# EAGLE board PCB v5 (EAGLE 9.7.0)
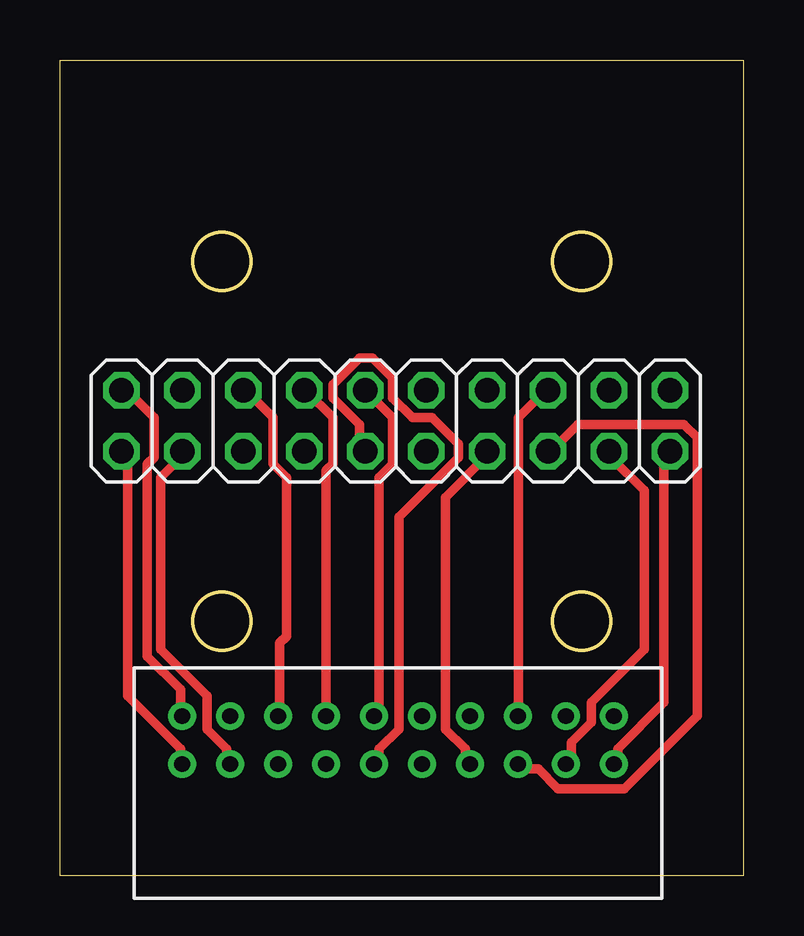
[diagram p0: board, top side]
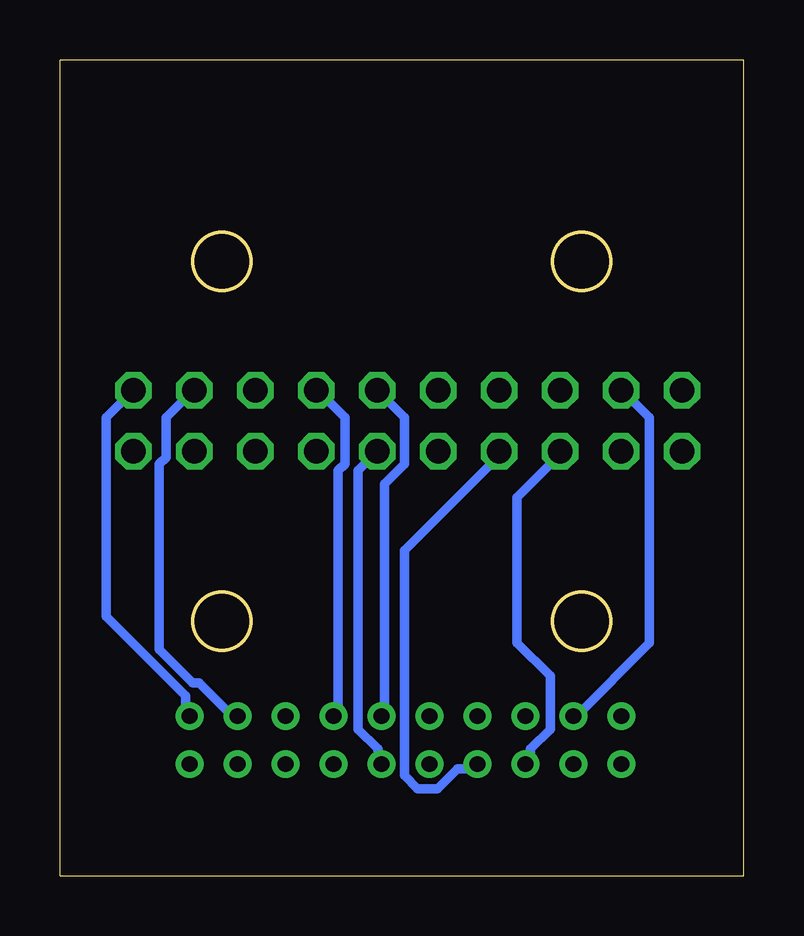
[diagram p1: board, bottom side, seen from below]

Size 28.5 x 34 mm. Coordinates in mm from the lower left corner, seen from the top.
Outline: 28.5,0 0,0 0,34 28.5,34 28.5,0
Outline: circle at 21.75,25.6 radius 1.2
Outline: circle at 21.75,10.6 radius 1.2
Outline: circle at 6.75,25.6 radius 1.2
Outline: circle at 6.75,10.6 radius 1.2
Copper layers (1*16): Top 0.035mm / dielectric 1.5mm / Bottom 0.035mm
Design rules "Fusion Electronics Design Rules": minimum track width 0.4mm, minimum drill 0.35mm, track to track 6mil, track to pad 6mil, pad to pad 6mil, via to via 6mil, smd to smd 6mil, copper to edge 40mil, drill to drill 6mil, minimum pad ring 10mil, minimum via ring 8mil, stop-mask expansion 4mil, vias tented up to drill 0mil, thermal gap 10mil

## Footprints (pad centres in the part's own frame; a part is rotated, then mirrored left to right if it is on the bottom)
2X10 = drill 1.016 octagon: 1 -11.43,-1.27; 2 -11.43,1.27; 3 -8.89,-1.27; 4 -8.89,1.27; 5 -6.35,-1.27; 6 -6.35,1.27; 7 -3.81,-1.27; 8 -3.81,1.27; 9 -1.27,-1.27; 10 -1.27,1.27; 11 1.27,-1.27; 12 1.27,1.27; 13 3.81,-1.27; 14 3.81,1.27; 15 6.35,-1.27; 16 6.35,1.27; 17 8.89,-1.27; 18 8.89,1.27; 19 11.43,-1.27; 20 11.43,1.27
HEAD_CONNECTOR = drill 0.65: P$1 2,2; P$2 2,4; P$3 4,2; P$4 4,4; P$5 6,2; P$6 6,4; P$7 8,2; P$8 8,4; P$9 10,2; P$10 10,4; P$11 12,2; P$12 12,4; P$13 14,2; P$14 14,4; P$15 16,2; P$16 16,4; P$17 18,2; P$18 18,4; P$19 20,2; P$20 20,4

## Placement (x,y rotation side)
JP1  PINHD-2X10  [2X10]  14,18.95 180 top
U$1  HEAD_CONNECTOR  [HEAD_CONNECTOR]  25.09,8.65 180 top

## Library data of the parts
JP1 = Connector; CATEGORY: Headers; DESCRIPTION: Header-Straight-2x10 Position; PACKAGE_TYPE: THT; PITCH: 0.100" (2.54mm); SUBCATEGORY: Headers-Male Pins; TYPE: Board to Board or Cable-Unshrouded-Through Hole-Straight
U$1 = PNP

## Nets
1: JP1.1 U$1.P$1
2: JP1.2 U$1.P$2
3: JP1.3 U$1.P$3
4: JP1.4 U$1.P$4
5: JP1.5 U$1.P$5
6: JP1.6 U$1.P$6
8: JP1.8
9: JP1.9
10: JP1.10
11: JP1.11 U$1.P$11
12: JP1.12 U$1.P$12
13: JP1.13 U$1.P$13
14: JP1.14 U$1.P$14
15: JP1.15 U$1.P$15
16: JP1.16 U$1.P$16
17: JP1.17 U$1.P$17
18: JP1.18 U$1.P$18
19: JP1.19 U$1.P$19
20: JP1.20 U$1.P$20
E1: JP1.7 U$1.P$7
E2: U$1.P$8
E3: U$1.P$9
E4: U$1.P$10

## Tracks (layer width: path | path; a pad name or v marks a point on that pad's centre or on a via)
1
  Bottom 0.4: U$1.P$1 23.25,6.66 23.25,7.48 26.57,10.8 26.57,19.09 25.46,20.19 JP1.1
2
  Top 0.4: U$1.P$2 23.25,4.72 23.25,5.27 25.19,7.21 25.19,17.43 JP1.2
3
  Bottom 0.4: U$1.P$3 21.32,6.66 22.7,8.04 22.98,8.04 24.36,9.42 24.36,17.15 24.08,17.43 24.08,19.09 22.98,20.19 JP1.3
4
  Top 0.4: U$1.P$4 21.32,4.72 21.32,5.55 22.15,6.38 22.15,7.21 24.36,9.42 24.36,16.05 22.98,17.43 JP1.4
5
  Top 0.4: U$1.P$5 19.11,19.09 20.21,20.19 JP1.5
6
  Top 0.4: U$1.P$6 19.11,4.45 19.94,4.45 20.77,3.62 23.53,3.62 26.57,6.66 26.57,18.26 26.01,18.81 21.59,18.81 20.49,17.7 JP1.6
8
  Top 0.4: 16.9,4.72 16.9,5.27 16.07,6.1 16.07,15.77 17.73,17.43 JP1.8
9
  Bottom 0.4: 14.97,6.66 14.97,16.32 14.14,17.15 14.14,19.09 15.24,20.19 JP1.9
10
  Bottom 0.4: 15.24,4.72 15.24,5.27 16.07,6.1 16.07,16.88 15.52,17.43 JP1.10
11
  Top 0.4: U$1.P$11 13.31,6.66 13.31,16.6 13.86,17.15 13.86,19.09 12.76,20.19 JP1.11
12
  Top 0.4: U$1.P$12 13.31,4.72 13.31,5.27 14.14,6.1 14.14,14.94 16.62,17.43 16.62,17.98 15.52,19.09 14.69,19.09 13.86,19.91 13.86,20.74 13.03,21.57 12.48,21.57 11.38,20.47 11.38,19.91 12.48,18.81 12.48,17.7 JP1.12
13
  Top 0.4: U$1.P$13 11.1,16.88 11.38,17.15 11.38,19.09 10.27,20.19 JP1.13
14
  Bottom 0.4: U$1.P$14 11.1,4.45 11.93,4.45 12.76,3.62 13.59,3.62 14.14,4.17 14.14,13.56 10.27,17.43 JP1.14
15
  Top 0.4: U$1.P$15 9.17,6.66 9.17,9.69 9.44,9.97 9.44,16.6 8.89,17.15 8.89,19.09 7.79,20.19 JP1.15
16
  Bottom 0.4: U$1.P$16 8.89,4.72 8.89,5.27 8.06,6.1 8.06,8.31 9.44,9.69 9.44,15.77 7.79,17.43 JP1.16
17
  Bottom 0.4: U$1.P$17 6.96,6.66 3.92,9.69 3.92,19.09 5.02,20.19 JP1.17
18
  Top 0.4: U$1.P$18 6.96,4.72 6.96,5.27 6.13,6.1 6.13,7.48 4.19,9.42 4.19,16.6 5.02,17.43 JP1.18
19
  Top 0.4: U$1.P$19 5.02,6.66 5.02,7.76 3.64,9.14 3.64,17.15 3.92,17.43 3.92,19.09 2.81,20.19 JP1.19
20
  Top 0.4: U$1.P$20 5.02,4.72 5.02,5.27 2.81,7.48 2.81,17.43 JP1.20
E1
  Bottom 0.4: U$1.P$7 16.9,6.66 16.9,16.88 16.62,17.15 16.62,19.09 17.73,20.19 JP1.7